# Altium PCB Buttons.PcbDoc
Units mil, origin at the board's own origin, x right, y up, seen from the top; angles counter-clockwise.
Board outline 6000 x 4000 mil, 2 copper layers (Top Layer, Bottom Layer); 20 components, 0 nets, 220 pads, 93 vias.
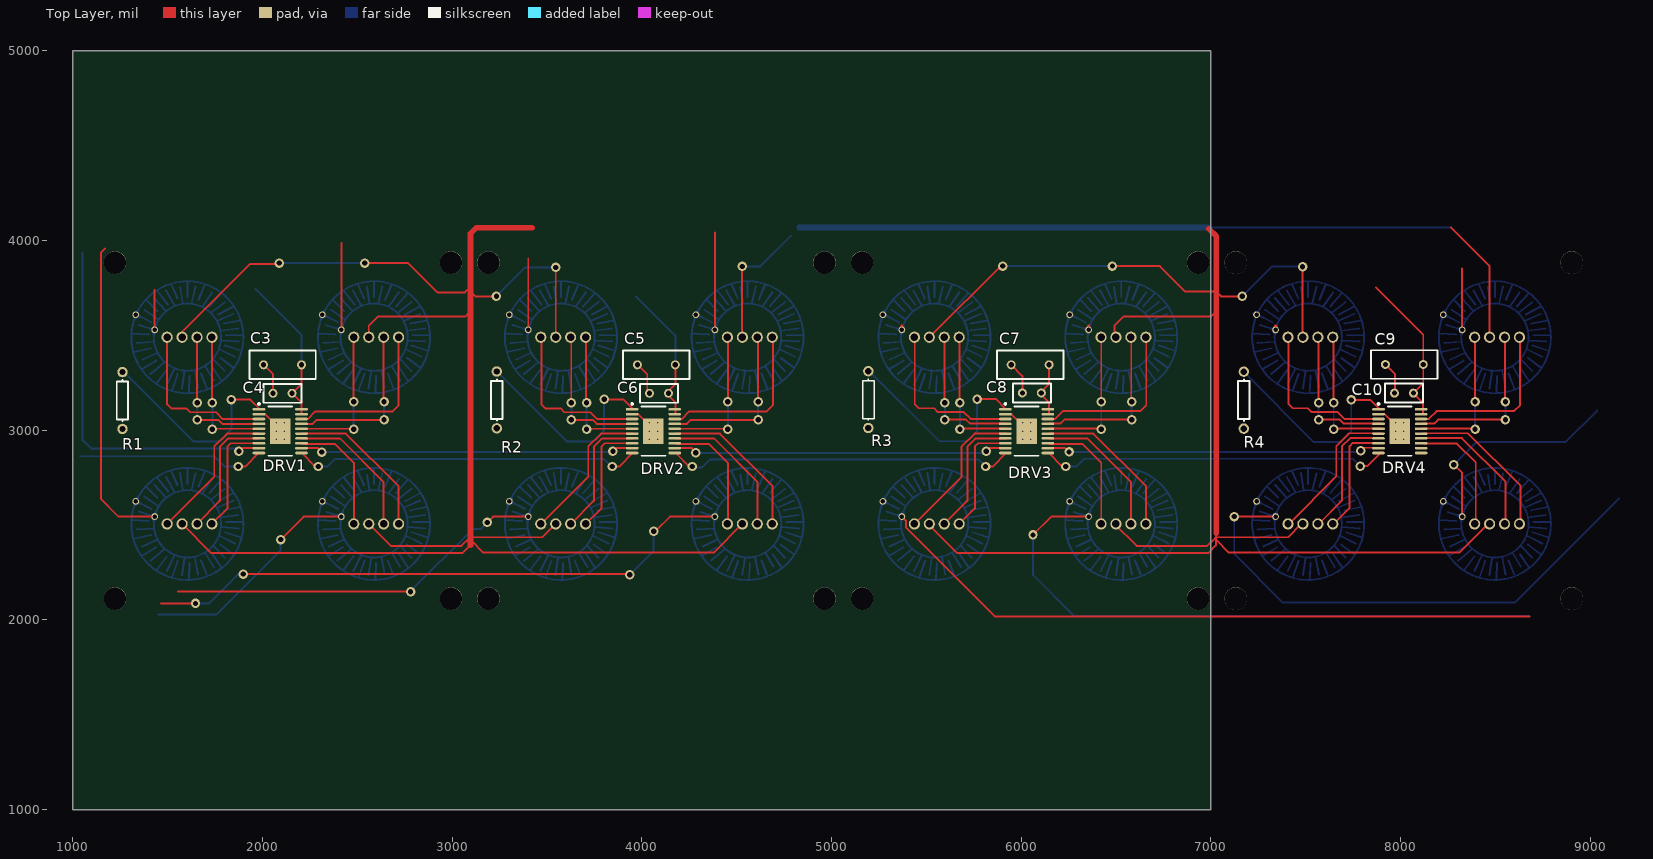
[diagram p0: Top Layer view]
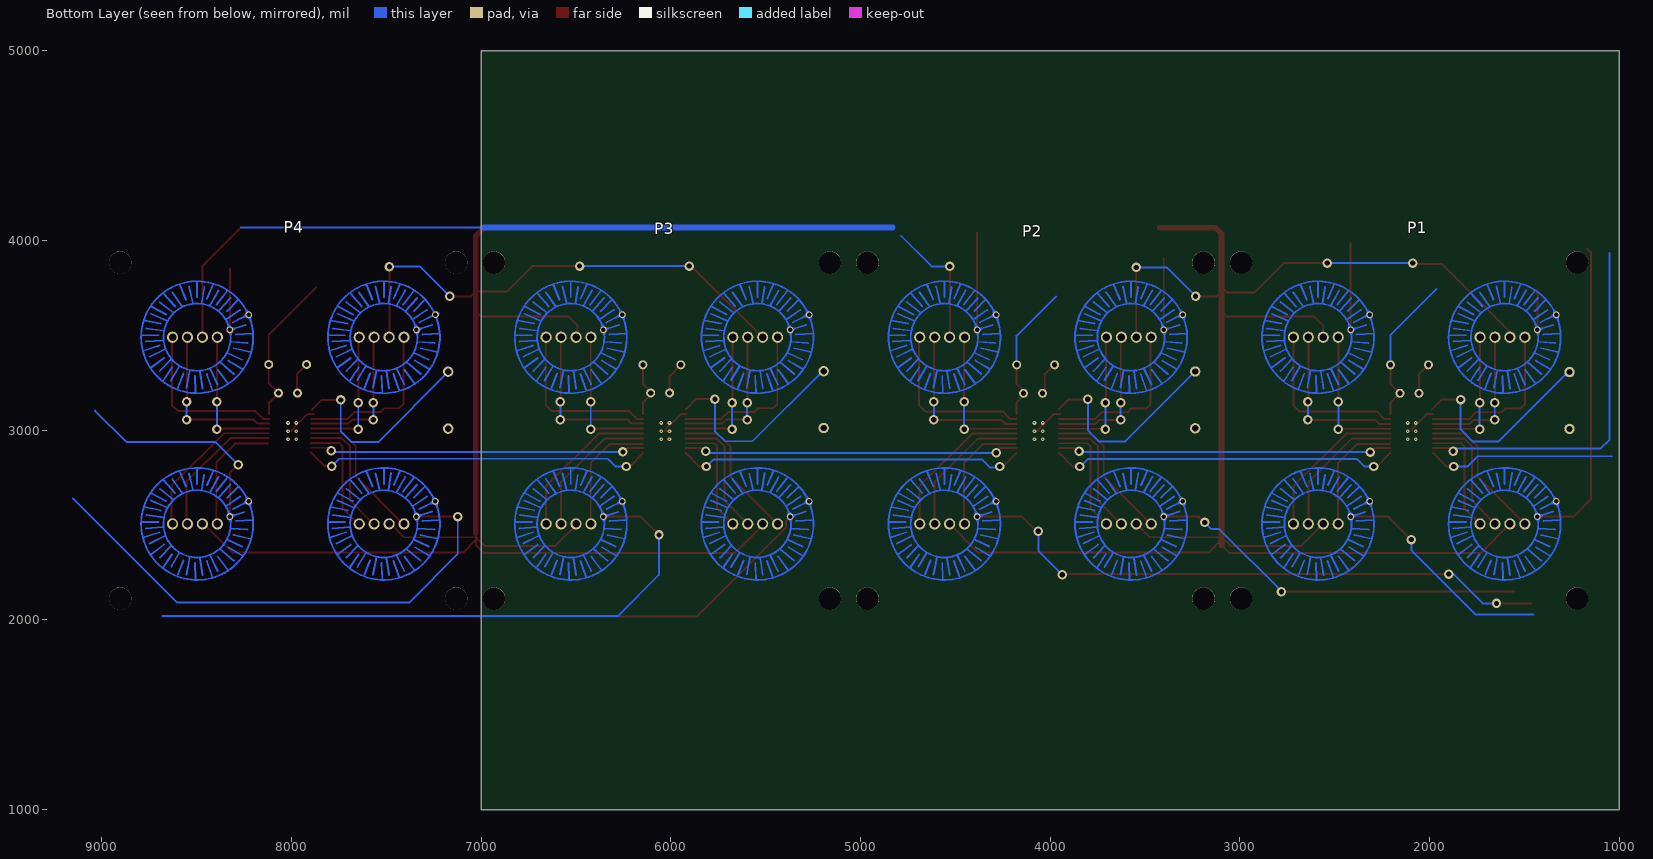
[diagram p1: Bottom Layer view, seen from below]

## Layer stack, top to bottom
Top Solder: solder mask 0.4, Solder Resist, Dk 3.5
Top Layer: signal copper 1.4
Dielectric 1: dielectric 12.6, FR-4, Dk 4.8
Bottom Layer: signal copper 1.4
Bottom Solder: solder mask 0.4, Solder Resist, Dk 3.5

## Board outline
1000,1000 7000,1000 7000,5000 1000,5000

## Design rules (kind name [scope] priority, off if disabled: settings)
Clearance [All] p1: gap=10 ignorepadtopadclearanceinfootprint=FALSE except(0: Arc-Hole Track-Hole SMDPad-Hole THPad-Hole Via-Hole Fill-Hole Poly-Hole Region-Hole Text-Hole)
ComponentClearance ComponentClearance_1 [All] p1: gap=10 collisioncheckmode=3 verticalgap=10 showdistances=FALSE
ComponentClearance "Buttons Clearance" [HasFootprint('BUTTONPAD-2X2') vs HasFootprint('BUTTONPAD-2X2')] p2: gap=0 collisioncheckmode=3 verticalgap=0 showdistances=FALSE
PolygonConnect [All] p1: connectstyle=Relief reliefconductorwidth=10 reliefentries=4 polygonreliefangle="90 Angle" airgapwidth=10
RoutingVias [All] p1: holewidth=28 width=50 viastyle="Through Hole" minholewidth=28 minwidth=50 maxholewidth=28 maxwidth=50
SolderMaskExpansion [All] p1: expansion=4
Width [All] p1: maxlimit=30 minlimit=10 preferedwidth=10
29 further rules are at their usual default settings.

## Components (designator, comment, footprint, x,y, rotation, side; value= is the part's Value field where it differs from the comment)
C3 "" RAD-0.2 2105,3345 r180 top value=10uF
C4 "Cap" RAD-0.1 2105,3195 r0 top value=".01 uF"
C5 "" RAD-0.2 4076,3345 r180 top value=10uF
C6 "Cap" RAD-0.1 4089.67,3195 r0 top value=".01 uF"
C7 "" RAD-0.2 6047,3345 r180 top value=10uF
C8 "Cap" RAD-0.1 6056,3197 r0 top value=".01 uF"
C9 "" RAD-0.2 8020,3347 r180 top value=10uF
C10 "Cap" RAD-0.1 8018,3196 r0 top value=".01 uF"
DRV1 "TLC5971PWPR" TI-PWP20-2965X2290TP_N 2092.8,2995.43 r0 top
DRV2 "TLC5971PWPR" TI-PWP20-2965X2290TP_N 4060.6,2995.43 r0 top
DRV3 "TLC5971PWPR" TI-PWP20-2965X2290TP_N 6028.4,2995.43 r0 top
DRV4 "TLC5971PWPR" TI-PWP20-2965X2290TP_N 7996.2,2995.43 r0 top
P1 "BUTTONPAD" BUTTONPAD-2X2 1122.24,2019.25 r0 bottom locked
P2 "BUTTONPAD" BUTTONPAD-2X2 3092.24,2019.25 r0 bottom locked
P3 "BUTTONPAD" BUTTONPAD-2X2 5062.24,2019.25 r0 bottom locked
P4 "BUTTONPAD" BUTTONPAD-2X2 7032.24,2019.25 r0 bottom locked
R1 "R1" AXIAL-0.3 1261,3157 r90 top value=2.5K
R2 "R2" AXIAL-0.3 3235,3160 r90 top value=2.5K
R3 "R3" AXIAL-0.3 5194,3162 r90 top value=2.5K
R4 "R4" AXIAL-0.3 7174,3159 r90 top value=2.5K

## Footprints (in the part's own frame and the unit in brackets; to place one, negate y for a bottom-side part, rotate by r counter-clockwise, add the part's x,y. Pads: shape width x height; smd on the part's side, far side on the other; paste and mask are expansions set on the pad)
AXIAL-0.3 [mm] "Axial Device, Thru-Hole; 2 Leads; 0.3 in Pin Spacing"
  round 1.4 hole 0.85: 1(-3.81,0) 2(3.81,0)
  silkscreen extent -2.77,-0.76 2.77,0.76
BUTTONPAD-2X2 [mm]
  round 3 hole 3: 1(2.508,-47.373) 1(2.508,-2.373) 1(47.508,-47.373) 1(47.508,-2.373)
  round 1.5 hole 1: BLU1(15.508,-37.373) BLU2(40.508,-37.373) BLU3(15.508,-12.373) BLU4(40.508,-12.373) GRN1(13.508,-37.373) GRN2(38.508,-37.373) GRN3(13.508,-12.373) GRN4(38.508,-12.373) RED1(9.508,-37.373) RED2(34.508,-37.373) RED3(9.508,-12.373) RED4(34.508,-12.373) VCC1(11.508,-37.373) VCC2(36.508,-37.373) VCC3(11.508,-12.373) VCC4(36.508,-12.373)
  round 0.9 hole 0.6: SIG1(5.296,-40.386) SIG2(7.836,-38.354) SIG3(30.296,-40.386) SIG4(32.836,-38.354) SIG5(5.296,-15.386) SIG6(7.836,-13.354) SIG7(30.296,-15.386) SIG8(32.836,-13.354)
  Top Layer circle w0.254: c12.208,-37.373 r7.5
  Top Layer circle w0.254: c12.208,-12.373 r7.5
  Top Layer circle w0.254: c37.208,-37.373 r7.5
  Top Layer circle w0.254: c37.208,-12.373 r7.5
  Top Layer lines w0.254: 4.728,-12.883 7.028,-12.743 ; 4.728,-37.883 7.028,-37.743 ; 5.048,-10.393 7.318,-10.903 ; 5.048,-35.393 7.318,-35.903 ; 5.368,-15.413 7.428,-14.373 ; 5.368,-40.413 7.428,-39.373 ; 5.448,-11.623 7.748,-11.763 ; 5.448,-36.623 7.748,-36.763 ; 5.731,-39.014 7.748,-38.373 ; 5.736,-14.012 7.748,-13.373 ; 6.138,-8.123 8.038,-9.243 ; 6.138,-33.123 8.038,-34.243 ; 6.198,-9.353 8.198,-10.293 ; 6.198,-34.353 8.198,-35.293 ; 6.438,-16.033 8.358,-14.753 ; 6.438,-41.033 8.358,-39.753 ; 6.708,-17.373 8.208,-15.873 ; 6.708,-42.373 8.208,-40.873 ; 7.288,-7.453 9.138,-9.003 ; 7.288,-32.453 9.138,-34.003 ; 7.768,-17.613 9.298,-15.923 ; 7.768,-42.613 9.298,-40.923 ; 8.118,-6.203 9.448,-8.003 ; 8.118,-31.203 9.448,-33.003 ; 8.198,-18.573 9.618,-16.733 ; 8.198,-43.573 9.618,-41.733 ; 9.358,-18.653 10.468,-16.673 ; 9.358,-43.653 10.468,-41.673 ; 9.478,-6.063 10.468,-8.153 ; 9.478,-31.063 10.468,-33.153 ; 10.048,-19.483 10.888,-17.553 ; 10.048,-44.483 10.888,-42.553 ; 10.178,-5.293 10.918,-7.423 ; 10.178,-30.293 10.918,-32.423 ; 11.243,-19.166 11.598,-16.943 ; 11.257,-44.081 11.598,-41.943 ; 11.498,-5.533 11.838,-7.803 ; 11.498,-30.533 11.838,-32.803 ; 12.208,-17.743 12.208,-19.833 ; 12.208,-42.743 12.208,-44.833 ; 12.428,-4.933 12.498,-7.163 ; 12.428,-29.933 12.498,-32.163 ; 12.798,-16.993 13.308,-19.163 ; 12.798,-41.993 13.308,-44.163 ; 13.198,-7.913 13.648,-5.613 ; 13.198,-32.913 13.648,-30.613 ; 13.708,-17.393 14.538,-19.403 ; 13.708,-42.393 14.538,-44.403 ; 14.058,-7.493 14.798,-5.563 ; 14.058,-32.493 14.798,-30.563 ; 14.188,-16.463 15.548,-18.383 ; 14.188,-41.463 15.548,-43.383 ; 14.618,-8.473 15.756,-6.604 ; 14.618,-33.473 15.756,-31.623 ; 15.178,-16.513 16.728,-18.283 ; 15.178,-41.513 16.728,-43.283 ; 15.388,-15.633 17.218,-17.073 ; 15.388,-40.633 17.218,-42.073 ; 15.578,-8.313 16.748,-6.573 ; 15.578,-33.313 16.748,-31.573 ; 15.708,-9.433 17.218,-7.853 ; 15.708,-34.433 17.218,-32.853 ; 16.188,-14.533 18.408,-15.523 ; 16.188,-39.533 18.408,-40.523 ; 16.348,-15.423 18.358,-16.493 ; 16.348,-40.423 18.358,-41.493 ; 16.508,-10.773 18.568,-9.753 ; 16.508,-35.773 18.568,-34.753 ; 16.618,-13.233 16.637,-13.235 ; 16.618,-38.233 16.637,-38.236 ; 16.648,-9.593 18.378,-8.313 ; 16.648,-34.593 18.378,-33.313 ; 16.808,-11.943 19.078,-11.783 ; 16.808,-36.943 19.078,-36.783 ; 17.098,-14.193 19.318,-14.613 ; 17.098,-39.193 19.318,-39.613 ; 17.258,-11.253 19.428,-10.553 ; 17.258,-36.253 19.428,-35.553 ; 17.388,-12.643 19.588,-12.613 ; 17.388,-37.643 19.588,-37.613 ; 19.018,-13.553 16.637,-13.235 ; 19.018,-38.553 16.637,-38.236 ; 29.728,-12.883 32.028,-12.743 ; 29.728,-37.883 32.028,-37.743 ; 30.048,-10.393 32.318,-10.903 ; 30.048,-35.393 32.318,-35.903 ; 30.368,-15.413 32.428,-14.373 ; 30.368,-40.413 32.428,-39.373 ; 30.448,-11.623 32.748,-11.763 ; 30.448,-36.623 32.748,-36.763 ; 30.748,-39.008 32.748,-38.373 ; 30.906,-13.958 32.748,-13.373 ; 31.138,-8.123 33.038,-9.243 ; 31.138,-33.123 33.038,-34.243 ; 31.198,-9.353 33.198,-10.293 ; 31.198,-34.353 33.198,-35.293 ; 31.438,-16.033 33.358,-14.753 ; 31.438,-41.033 33.358,-39.753 ; 31.708,-17.373 33.208,-15.873 ; 31.708,-42.373 33.208,-40.873 ; 32.288,-7.453 34.138,-9.003 ; 32.288,-32.453 34.138,-34.003 ; 32.768,-17.613 34.298,-15.923 ; 32.768,-42.613 34.298,-40.923 ; 33.118,-6.203 34.448,-8.003 ; 33.118,-31.203 34.448,-33.003 ; 33.198,-18.573 34.618,-16.733 ; 33.198,-43.573 34.618,-41.733 ; 34.358,-18.653 35.468,-16.673 ; 34.358,-43.653 35.468,-41.673 ; 34.478,-6.063 35.468,-8.153 ; 34.478,-31.063 35.468,-33.153 ; 35.048,-19.483 35.888,-17.553 ; 35.048,-44.483 35.888,-42.553 ; 35.178,-5.293 35.918,-7.423 ; 35.178,-30.293 35.918,-32.423 ; 36.257,-44.078 36.598,-41.943 ; 36.283,-18.916 36.598,-16.943 ; 36.498,-5.533 36.838,-7.803 ; 36.498,-30.533 36.838,-32.803 ; 37.208,-17.743 37.208,-19.833 ; 37.208,-42.743 37.208,-44.833 ; 37.428,-4.933 37.498,-7.163 ; 37.428,-29.933 37.498,-32.163 ; 37.798,-16.993 38.308,-19.163 ; 37.798,-41.993 38.308,-44.163 ; 38.198,-7.913 38.648,-5.613 ; 38.198,-32.913 38.648,-30.613 ; 38.708,-17.393 39.538,-19.403 ; 38.708,-42.393 39.538,-44.403 ; 39.058,-7.493 39.798,-5.563 ; 39.058,-32.493 39.798,-30.563 ; 39.188,-16.463 40.548,-18.383 ; 39.188,-41.463 40.548,-43.383 ; 39.618,-8.473 40.671,-6.67 ; 39.618,-33.473 40.741,-31.55 ; 40.178,-16.513 41.728,-18.283 ; 40.178,-41.513 41.728,-43.283 ; 40.388,-15.633 42.218,-17.073 ; 40.388,-40.633 42.218,-42.073 ; 40.578,-8.313 41.748,-6.573 ; 40.578,-33.313 41.748,-31.573 ; 40.708,-9.433 42.218,-7.853 ; 40.708,-34.433 42.218,-32.853 ; 41.188,-14.533 43.408,-15.523 ; 41.188,-39.533 43.408,-40.523 ; 41.348,-15.423 43.358,-16.493 ; 41.348,-40.423 43.358,-41.493 ; 41.508,-10.773 43.568,-9.753 ; 41.508,-35.773 43.568,-34.753 ; 41.618,-13.233 41.637,-13.235 ; 41.618,-38.233 41.637,-38.236 ; 41.648,-9.593 43.378,-8.313 ; 41.648,-34.593 43.378,-33.313 ; 41.808,-11.943 44.078,-11.783 ; 41.808,-36.943 44.078,-36.783 ; 42.098,-14.193 44.318,-14.613 ; 42.098,-39.193 44.318,-39.613 ; 42.258,-11.253 44.428,-10.553 ; 42.258,-36.253 44.428,-35.553 ; 42.388,-12.643 44.588,-12.613 ; 42.388,-37.643 44.588,-37.613 ; 44.018,-13.553 41.637,-13.235 ; 44.018,-38.553 41.637,-38.236 ; 16.637,-13.235 ccw(c12.218,-12.383) 12.218,-7.883 ccw(c12.218,-12.383) 16.637,-13.235 ; 16.637,-38.236 cw(c12.218,-37.383) 12.218,-32.883 cw(c12.218,-37.383) 16.637,-38.236 ; 41.637,-13.235 ccw(c37.218,-12.383) 37.218,-7.883 ccw(c37.218,-12.383) 41.637,-13.235 ; 41.637,-38.236 cw(c37.218,-37.383) 37.218,-32.883 cw(c37.218,-37.383) 41.637,-38.236
RAD-0.1 [mm] "Radial Cap, Thru-Hole; 2 Leads; 0.1 in Pin Spacing"
  round 1.2 hole 0.7: 1(-1.27,0) 2(1.27,0)
  silkscreen extent -2.54,-1.27 2.54,1.27
RAD-0.2 [mm] "Radial Cap, Thru-Hole; 2 Leads; 0.2 in Pin Spacing"
  round 1.2 hole 0.7: 1(-2.54,0) 2(2.54,0)
  silkscreen extent -4.44,-1.91 4.44,1.91
TI-PWP20-2965X2290TP_N [mm] "SOP, 20-Leads, Body 6.5x4.4mm, Pitch 0.65mm, Thermal Pad 2.965x2.29mm, IPC Medium Density"
  oval 1.7x0.35 smd: 1(-2.85,2.925) 2(-2.85,2.275) 3(-2.85,1.625) 4(-2.85,0.975) 5(-2.85,0.325) 6(-2.85,-0.325) 7(-2.85,-0.975) 8(-2.85,-1.625) 9(-2.85,-2.275) 10(-2.85,-2.925) 11(2.85,-2.925) 12(2.85,-2.275) 13(2.85,-1.625) 14(2.85,-0.975) 15(2.85,-0.325) 16(2.85,0.325) 17(2.85,0.975) 18(2.85,1.625) 19(2.85,2.275) 20(2.85,2.925)
  rect 2.75x3.43 smd: 21(0,0)
  silkscreen extent -2.97,-3.3 1.6,3.77, body extent -2.25,-3.3 2.25,3.3, height 1.2

## Part data
C3 C5 C7 C9: library part "Cap Pol2", "Polarized Capacitor (Axial)", LatestRevisionDate=17-Jul-2002, LatestRevisionNote="Re-released for DXP Platform.", PackageDescription="Polarized Capacitor; 2 Leads", PackageReference=POLAR0.8, Published=8-Jun-2000, Publisher="Altium Limited"
C4 C6 C8 C10: "Capacitor", LatestRevisionDate=17-Jul-2002, LatestRevisionNote="Re-released for DXP Platform.", PackageDescription="Radial Cap, Thru-Hole; 2 Leads; 0.3 in Pin Spacing", PackageReference=RAD-0.3, Published=8-Jun-2000, Publisher="Altium Limited"
DRV1 DRV2 DRV3 DRV4: "12-Channel, 16-Bit ES-PWM RGB LED Driver with 3.3 V Linear Regulator, 6 to 17 V, -40 to 85 degC, 20-pin SOP (PWP20), Green (RoHS & no Sb/Br)", Manufacturer="Texas Instruments", Rating=Catalog, Supplier Part Number 1=296-27796-2-ND, Code_JEDEC=MO-153, ComponentLink1Description="Manufacturer URL", ComponentLink1URL=http://www.ti.com/, ComponentLink2Description=Datasheet, ComponentLink2URL=http://www.ti.com/general/docs/lit/getliterature.tsp?genericPartNumber=TLC5971&fileType=pdf, ComponentLink3Description="Package Specification", ComponentLink3URL=http://www.ti.com/litv/pdf/mhts001g, DatasheetVersion=SBVS146C, Eco-Plan="Green (RoHS & no Sb/Br)", Mounting Technology="Surface Mount", PackageDescription="20-Lead, Plastic Small Outline, Body Size 4.4 x 6.5 mm, Pitch 0.65 mm", PackageReference=PWP20-2965X2290TP, PackageVersion=4073225-4/I, PartNumber=TLC5971PWPR, SubFamily="LED Driver", Supplier 1=Digi-Key, Supplier 2=Digi-Key, Supplier 3=Digi-Key, Supplier 4=Newark, Supplier 5=Mouser, Supplier Part Number 2=296-27796-1-ND, Supplier Part Number 3=296-27796-6-ND, Supplier Part Number 4=01T0730, Supplier Part Number 5=595-TLC5971PWPR, Vin(Max)(V)=17, Vin(Min)(V)=6
P1 P2 P3 P4: library part BUTTONPAD-2X2, "5mm Button PadProven layout and schematic for 2x2 button pad. Panelize this device/fp to a 4x4 pad if needed. Spark Fun Electronics SKU : COM-07835. Compatible common cathode tri-color LED SKU : COM-00105"
R1 R2 R3 R4: library part Res1, "Resistor", LatestRevisionDate=17-Jul-2002, LatestRevisionNote="Re-released for DXP Platform.", PackageDescription="Axial Device, Thru-Hole; 2 Leads; 0.3 in Pin Spacing", PackageReference=AXIAL-0.3, Published=8-Jun-2000, Publisher="Altium Limited"

## Via types
v1: diameter 50, hole 28, Top Layer to Bottom Layer, 69 vias
v2: diameter 19.68, hole 7.87, Top Layer to Bottom Layer, 24 vias

## Nets (pads, with @x,y where several pads share a name; then routed paths per layer and width w, separated by ;. In a path a pad name is that pad's centre, name@x,y a point inside that pad or via, vN(x,y) a via of type N, cw(c..) or ccw(c..) an arc to the next point about the centre after c; other vN are vias at no path point)
pads on no net: C3.1 C3.2 C4.1 C4.2 C5.1 C5.2 C6.1 C6.2 C7.1 C7.2 C8.1 C8.2 C9.1 C9.2 C10.1 C10.2 DRV1.1 DRV1.2 DRV1.3 DRV1.4 DRV1.5 DRV1.6 DRV1.7 DRV1.8 DRV1.9 DRV1.10 DRV1.11 DRV1.12 DRV1.13 DRV1.14 DRV1.15 DRV1.16 DRV1.17 DRV1.18 DRV1.19 DRV1.20 DRV1.21 DRV2.1 DRV2.2 DRV2.3 DRV2.4 DRV2.5 DRV2.6 DRV2.7 DRV2.8 DRV2.9 DRV2.10 DRV2.11 DRV2.12 DRV2.13 DRV2.14 DRV2.15 DRV2.16 DRV2.17 DRV2.18 DRV2.19 DRV2.20 DRV2.21 DRV3.1 DRV3.2 DRV3.3 DRV3.4 DRV3.5 DRV3.6 DRV3.7 DRV3.8 DRV3.9 DRV3.10 DRV3.11 DRV3.12 DRV3.13 DRV3.14 DRV3.15 DRV3.16 DRV3.17 DRV3.18 DRV3.19 DRV3.20 DRV3.21 DRV4.1 DRV4.2 DRV4.3 DRV4.4 DRV4.5 DRV4.6 DRV4.7 DRV4.8 DRV4.9 DRV4.10 DRV4.11 DRV4.12 DRV4.13 DRV4.14 DRV4.15 DRV4.16 DRV4.17 DRV4.18 DRV4.19 DRV4.20 DRV4.21 P1.1 P1.BLU1 P1.BLU2 P1.BLU3 P1.BLU4 P1.GRN1 P1.GRN2 P1.GRN3 P1.GRN4 P1.RED1 P1.RED2 P1.RED3 P1.RED4 P1.SIG1 P1.SIG2 P1.SIG3 P1.SIG4 P1.SIG5 P1.SIG6 P1.SIG7 P1.SIG8 P1.VCC1 P1.VCC2 P1.VCC3 P1.VCC4 P2.1 P2.BLU1 P2.BLU2 P2.BLU3 P2.BLU4 P2.GRN1 P2.GRN2 P2.GRN3 P2.GRN4 P2.RED1 P2.RED2 P2.RED3 P2.RED4 P2.SIG1 P2.SIG2 P2.SIG3 P2.SIG4 P2.SIG5 P2.SIG6 P2.SIG7 P2.SIG8 P2.VCC1 P2.VCC2 P2.VCC3 P2.VCC4 P3.1 P3.BLU1 P3.BLU2 P3.BLU3 P3.BLU4 P3.GRN1 P3.GRN2 P3.GRN3 P3.GRN4 P3.RED1 P3.RED2 P3.RED3 P3.RED4 P3.SIG1 P3.SIG2 P3.SIG3 P3.SIG4 P3.SIG5 P3.SIG6 P3.SIG7 P3.SIG8 P3.VCC1 P3.VCC2 P3.VCC3 P3.VCC4 P4.1 P4.BLU1 P4.BLU2 P4.BLU3 P4.BLU4 P4.GRN1 P4.GRN2 P4.GRN3 P4.GRN4 P4.RED1 P4.RED2 P4.RED3 P4.RED4 P4.SIG1 P4.SIG2 P4.SIG3 P4.SIG4 P4.SIG5 P4.SIG6 P4.SIG7 P4.SIG8 P4.VCC1 P4.VCC2 P4.VCC3 P4.VCC4 R1.1 R1.2 R2.1 R2.2 R3.1 R3.2 R4.1 R4.2
copper on no net: | length 102995.3
  Top Layer w10: 1169,3959.13 1146.93,3937.07 1146.93,2638.07 1240,2545 1430.75,2545 ; 1430.75,3529.25 1430.75,3738.75 ; 1463,2087 v1(1646,2087) ; 1496.58,2506.38 1745,2754.8 1745,2915 1812.64,2982.64 1980.59,2982.64 ; 1496.58,3490.63 1496.58,3136.58 1518.16,3115 1598.43,3115 1618.43,3095 1755,3095 1790.59,3059.41 1980.59,3059.41 ; 1553,2149 v1(2780,2149) ; 1575.32,2506.38 1729.7,2352 3053,2352 3094.5,2393.5 3094.5,2459 3096,2457.5 3097,2456.5 ; 1575.32,3490.63 1575.32,3518.32 1934,3877 2082,3877 v1(2087,3882) ; 1654.06,2506.38 1775,2627.32 1775,2913 1819.05,2957.05 1980.59,2957.05 ; 1654.06,3490.63 1654.06,3145.94 v1(1655,3145) ; v1(1655,3055) 1766.72,3055 1787.9,3033.82 1980.59,3033.82 ; 1732.8,2506.38 1815,2588.58 1815,2915 1831.46,2931.46 1980.59,2931.46 ; 1732.8,3490.63 1732.8,3147.2 v1(1735,3145) ; v1(1735,3005) 1738.23,3008.23 1980.59,3008.23 ; v1(1835,3162) 1935.18,3162 1987.59,3109.59 ; v1(1871,2809) 1909.32,2809 1980.59,2880.28 ; v1@1877,2871.66 1885,2879.66 v1(1875,2889.66) 1891.2,2905.87 1980.59,2905.87 ; v1(1897,2242) 3933,2242 v1(3936,2239) ; 1980.59,3085 2012.53,3085 2092.8,3004.74 2092.8,2995.43 ; 2005,3345 2055,3295 2055,3195 ; v1(2095,2424) 2216,2545 2415,2545 ; 2205,2880.28 2276.28,2809 v1(2294,2809) ; 2205,2905.87 2291.13,2905.87 v1(2312,2885) ; 2205,2931.46 2208.7,2927.76 2381.24,2927.76 2480.83,2828.17 2480.83,2506.38 ; 2205,2957.05 2407.95,2957.05 2638.31,2726.69 2638.31,2506.38 ; 2205,2982.64 2439.36,2982.64 2717.05,2704.95 2717.05,2506.38 ; 2205,3008.23 2476.77,3008.23 v1(2480,3005) ; 2205,3033.82 2263.82,3033.82 2285,3055 v1(2640,3055) ; 2205,3059.41 2236.94,3059.41 2277.53,3100 2685,3100 2717.05,3132.05 2717.05,3490.63 ; 2205,3085 2205,3110.59 2205,3145 2155,3195 2205,3245 2205,3345 ; 2415,3529.25 2415,3989 ; v1(2480,3150) 2480,3493.43 ; 2480.83,3490.63 2495,3504.8 ; v1(2539,3882) 2767,3882 2922,3727 3066.5,3727 3094.5,3755 ; 2559.57,2506.38 2675.95,2390 3048,2390 3090,2432 ; 2559.57,3490.63 2559.57,3551.57 2607,3599 3070,3599 3070,3601 3088,3619 ; v1@2638.31,3145.94 2638.31,3490.63 ; 3094.5,3733 3096,3731.5 3121.5,3706 v1(3233,3706) ; 3099,2419 3163,2355 4378.19,2355 4529.57,2506.38 ; 3099,2436 3474.94,2436 3545.32,2506.38 ; v1(3184,2514) 3215,2545 3400.75,2545 ; 3400.75,3529.25 3400.75,3906.75 ; 3468.58,2506.38 3717,2754.8 3717,2915 3784.64,2982.64 3948.39,2982.64 3952.59,2982.64 ; 3469.58,3490.63 3469.58,3136.58 3491.16,3115 3571.43,3115 3591.43,3095 3728,3095 3763.59,3059.41 3948.39,3059.41 3953.59,3059.41 ; 3545.32,3490.63 v1(3545.32,3858.68) ; 3626.06,2506.38 3747,2627.32 3747,2913 3791.05,2957.05 3948.39,2957.05 3952.59,2957.05 ; 3627.06,3490.63 3627.06,3145.94 v1(3628,3145) ; v1(3628,3055) 3739.72,3055 3760.9,3033.82 3948.39,3033.82 3953.59,3033.82 ; 3704.8,2506.38 3787,2588.58 3787,2915 3803.46,2931.46 3948.39,2931.46 3952.59,2931.46 ; 3705.8,3490.63 3705.8,3147.2 v1(3708,3145) ; v1(3708,3005) 3711.23,3008.23 3948.39,3008.23 3953.59,3008.23 ; v1(3801,3163) 3901.18,3163 3953.59,3110.59 ; v1(3843,2809) 3881.32,2809 3952.59,2880.28 ; v1@3863.2,2905.87 3948.39,2905.87 3952.59,2905.87 ; 3948.39,3085 3980.34,3085 4060.6,3004.74 4060.6,2995.43 ; 3978,3345 4028,3295 4028,3195 ; v1@4071,2468 4148,2545 4385,2545 ; 4177,2880.28 v1@4248.28,2809 ; 4177,2905.87 4263.13,2905.87 4284,2885 v1(4284,2881) ; 4177,2957.05 4379.95,2957.05 4610.31,2726.69 4610.31,2506.38 ; 4177,2982.64 4411.36,2982.64 4689.05,2704.95 4689.05,2506.38 ; 4178,3008.23 4449.77,3008.23 v1(4453,3005) ; 4178,3033.82 4236.82,3033.82 4258,3055 v1(4613,3055) ; 4178,3059.41 4209.94,3059.41 4250.53,3100 4658,3100 4690.05,3132.05 4690.05,3490.63 ; 4178,3085 4178,3145 4128,3195 4178,3245 4178,3345 ; 4180.7,2927.76 4353.24,2927.76 4452.83,2828.17 4452.83,2506.38 ; 4385,3529.25 4385,4042 ; v1(4453,3150) 4453,3493.43 ; 4528.32,3495.63 v1(4528.32,3863.68) ; v1@4611.31,3145.94 4611.31,3490.63 ; 5370.75,2545 5392.05,2523.7 5392.05,2487.94 5861.99,2018 8681,2018 ; 5437.58,2506.38 5686,2754.8 5686,2915 5753.64,2982.64 5921.59,2982.64 ; 5438.58,3491.63 5438.58,3137.58 5460.16,3116 5540.43,3116 5560.43,3096 5697,3096 5732.59,3060.41 5922.59,3060.41 ; 5501.48,3504.47 5529.16,3504.47 5890.69,3866 v1(5902,3866) ; 5507.32,2506.38 5661.7,2352 6985,2352 7026.5,2393.5 7026.5,2459 7028,2457.5 ; 5595.06,2506.38 5716,2627.32 5716,2913 5760.05,2957.05 5921.59,2957.05 ; 5596.06,3491.63 5596.06,3146.94 v1(5597,3146) ; v1(5597,3056) 5708.72,3056 5729.9,3034.82 5922.59,3034.82 ; 5673.8,2506.38 5756,2588.58 5756,2915 5772.46,2931.46 5921.59,2931.46 ; 5674.8,3491.63 5674.8,3148.2 v1(5677,3146) ; v1(5677,3006) 5680.23,3009.23 5922.59,3009.23 ; v1(5767,3164) 5867.18,3164 5919.59,3111.59 ; v1(5812,2809) 5850.32,2809 5921.59,2880.28 ; v1@5832.2,2905.87 5921.59,2905.87 ; 5916.2,3085 5948.14,3085 6028.4,3004.74 6028.4,2995.43 ; 5947,3345 6006,3286 6006,3197 ; v1(6062,2448) 6159,2545 6355,2545 ; 6146,2880.28 v1@6217.28,2809 ; 6146,2905.87 6232.13,2905.87 v1(6252,2886) ; 6146,2957.05 6348.95,2957.05 6579.31,2726.69 6579.31,2506.38 ; 6146,2982.64 6380.36,2982.64 6658.05,2704.95 6658.05,2506.38 ; 6147,3009.23 6418.77,3009.23 v1(6422,3006) ; 6147,3034.82 6205.82,3034.82 6227,3056 v1(6582,3056) ; 6147,3060.41 6178.94,3060.41 6219.53,3101 6627,3101 6659.05,3133.05 6659.05,3491.63 ; 6147,3086 6147,3146 6097,3196 6147,3246 6147,3345 6163,3361 ; 6149.7,2927.76 6322.24,2927.76 6421.83,2828.17 6421.83,2506.38 ; v1(6422,3151) 6422,3494.43 ; v1(6481,3866) 6731,3866 6866,3731 7010.5,3731 7028,3748.5 7038.5,3759 ; 6491.57,2506.38 6607.95,2390 6980,2390 7022,2432 ; 6491.57,3490.63 6491.57,3551.57 6539,3599 7002,3599 7002,3601 7020,3619 ; v1@6580.31,3146.94 6580.31,3491.63 ; 7028,3731.5 7053.5,3706 v1(7165,3706) ; 7031,2419 7095,2355 8310.19,2355 8461.57,2506.38 ; 7031,2436 7406.94,2436 7477.32,2506.38 ; v1(7123,2545) 7340.75,2545 ; 7409.58,3491.63 7409.58,3137.58 7431.16,3116 7511.43,3116 7531.43,3096 7668,3096 7703.59,3060.41 7893.59,3060.41 ; 7412.58,2508.38 7661,2756.8 7661,2917 7728.64,2984.64 7896.59,2984.64 ; 7483.32,3494.63 v1(7483.32,3862.68) ; 7567.06,3491.63 7567.06,3146.94 v1(7568,3146) ; v1(7568,3056) 7679.72,3056 7700.9,3034.82 7893.59,3034.82 ; 7570.06,2508.38 7691,2629.32 7691,2915 7735.05,2959.05 7896.59,2959.05 ; 7645.8,3491.63 7645.8,3148.2 v1(7648,3146) ; v1(7648,3006) 7651.23,3009.23 7893.59,3009.23 ; 7648.8,2508.38 7731,2590.58 7731,2917 7747.46,2933.46 7896.59,2933.46 ; v1(7740,3160) 7840.18,3160 7892.59,3107.59 ; v1(7787,2811) 7825.32,2811 7896.59,2882.28 ; v1@7807.2,2907.87 7896.59,2907.87 ; 7870,3754 8120,3504 8120,3347 8120,3248 8068,3196 8118,3146 8118,3086 ; 7884,3085 7915.94,3085 7996.2,3004.74 7996.2,2995.43 ; 7920,3347 7971,3296 7971,3199 7968,3196 ; 8118,3009.23 8389.77,3009.23 v1(8393,3006) ; 8118,3034.82 8176.82,3034.82 8198,3056 v1(8553,3056) ; 8118,3060.41 8149.94,3060.41 8190.53,3101 8598,3101 8630.05,3133.05 8630.05,3491.63 ; 8121,2959.05 8323.95,2959.05 8554.31,2728.69 8554.31,2508.38 ; 8121,2984.64 8355.36,2984.64 8633.05,2706.95 8633.05,2508.38 ; 8124.7,2929.76 8297.24,2929.76 8396.83,2830.17 8396.83,2508.38 ; 8265.5,4069.5 8469.57,3865.43 8469.57,3490.63 ; v1(8281,2819) 8325,2775 8325,2545 ; 8325,3529.25 8325,3854 ; v1(8393,3151) 8393,3494.43 ; v1@8551.31,3146.94 8551.31,3491.63
  Top Layer w30: 3096,2393.5 3096,2457.5 3096,3731.5 3096,4037 3127.5,4068.5 3420.5,4068.5 ; 6990,4062 7028,4024 7028,3748.5 7028,3731.5 7028,2457.5
  Bottom Layer w10: 1037,2863 1745,2863 1799,2809 v1(1871,2809) ; 1050,3935 1050,2950 1096,2904 1860.66,2904 v1(1875,2889.66) ; 1267.5,3309.5 1637,2940 1770,2940 1835,3005 v1(1835,3162) ; 1451,2029 1757,2029 2095,2367 v1(2095,2424) ; v1@1640,2082 1645.5,2087.5 1717.5,2087.5 1872,2242 v1(1897,2242) ; v1(1655,3055) v1(1655,3145) ; v1(1735,3005) v1(1735,3145) ; 1963,3744 2205,3502 2205,3345 ; v1(2087,3882) v1(2539,3882) ; v1@2286,2808 2341,2808 2382,2849 3799,2849 v1@3838,2810 ; v1@2303,2885 v1(2312,2885) v1@3836.34,2885 ; v1(2480,3150) 2480,3015 v1@2485,3010 ; v1(2640,3055) v1@2640,3145 ; v1@2771.5,2142.5 3108,2479 3149,2479 v1(3184,2514) ; v1@3225,3700 3383.68,3858.68 v1(3545.32,3858.68) ; 3233.5,3310.5 3603,2941 3743,2941 3801,2999 v1(3801,3163) ; v1(3628,3055) v1(3628,3145) ; v1(3708,3005) v1(3708,3145) ; v1(3936,2239) 4062,2365 v1(4062,2468) ; 3968,3707 4176,3499 4176,3345 ; v1@4262,2804 4317,2804 4358,2845 5775,2845 v1@5814,2806 ; v1@4279,2881 v1(4284,2881) v1@5812.34,2881 ; v1(4453,3150) 4453,3015 v1@4458,3010 ; v1(4528.32,3863.68) 4624.68,3863.68 4786,4025 ; v1(4613,3055) v1@4613,3145 ; 5199.5,3311.5 5569,2942 5713,2942 5767,2996 v1(5767,3164) ; v1(5597,3056) v1(5597,3146) ; v1(5677,3006) v1(5677,3146) ; v1(5902,3866) v1(6481,3866) ; v1(6062,2448) 6062,2237 6278,2021 8681,2021 ; v1(6235,2809) 6290,2809 6331,2850 7748,2850 v1(7787,2811) ; v1(6252,2886) 7785.34,2886 v1(7791,2891.66) ; v1(6422,3151) 6422,3016 v1@6427,3011 ; v1(6582,3056) v1@6582,3146 ; 6985,4069 6985.5,4069.5 8265.5,4069.5 ; v1(7123,2545) 7123,2348 7380,2091 8602,2091 9152,2641 ; v1(7165,3706) 7321.68,3862.68 v1(7483.32,3862.68) ; 7172.5,3307.5 7542,2938 7682,2938 7740,2996 v1(7740,3160) ; v1(7568,3056) v1(7568,3146) ; v1(7648,3006) v1(7648,3146) ; v1(8281,2819) 8401,2939 8871,2939 9036,3104 ; v1(8393,3151) 8393,3016 v1@8398,3011 ; v1(8553,3056) v1@8553,3146
  Bottom Layer w30: 4830,4069 6985,4069 ; 7235,3615 7240.75,3609.25
  other v1: 4266,2809 3847,2889.66 5816,2889.66 2640,3150 4613,3150 6582,3151 8553,3151
  other v2: 2071.14,2952.13 2114.45,2952.13 4038.94,2952.13 4082.25,2952.13 6006.75,2952.12 6050.06,2952.12 7974.55,2952.12 8017.86,2952.12 2071.14,2995.43 2114.45,2995.43 4038.94,2995.43 4082.25,2995.43 6006.75,2995.43 6050.06,2995.43 7974.55,2995.43 8017.86,2995.43 2071.14,3038.74 2114.45,3038.74 4038.94,3038.74 4082.25,3038.74 6006.75,3038.74 6050.06,3038.74 7974.55,3038.74 8017.86,3038.74

## Text inside footprints (layer, text, board x,y; h text height)
P1: Mechanical 2 "C4" at 2569.41,2575.27 h62; Mechanical 2 "C3" at 1585.16,2585.12 h62; Mechanical 2 "C2" at 2569.41,3569.37 h62; Mechanical 2 "C1" at 1585.16,3569.37 h62
P2: Mechanical 2 "C1" at 3555.16,3569.37 h62; Mechanical 2 "C2" at 4539.41,3569.37 h62; Mechanical 2 "C3" at 3555.16,2585.12 h62; Mechanical 2 "C4" at 4539.41,2575.27 h62
P3: Mechanical 2 "C4" at 6509.41,2575.27 h62; Mechanical 2 "C3" at 5525.16,2585.12 h62; Mechanical 2 "C2" at 6509.41,3569.37 h62; Mechanical 2 "C1" at 5525.16,3569.37 h62
P4: Mechanical 2 "C1" at 7495.16,3569.37 h62; Mechanical 2 "C2" at 8479.41,3569.37 h62; Mechanical 2 "C3" at 7495.16,2585.12 h62; Mechanical 2 "C4" at 8479.41,2575.27 h62